# Altium PCB TS12A4514DBVR.PcbDoc
Units mil, origin at the board's own origin, x right, y up, seen from the top; angles counter-clockwise.
Board outline 588 x 300 mil, 2 copper layers (Top, Bottom), stack 61.811 mil thick; 3 components, 5 nets, 10 pads, 0 vias.
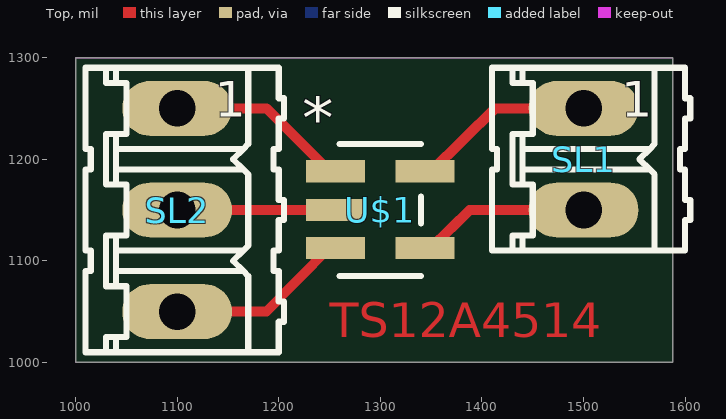
[diagram p0: Top view]
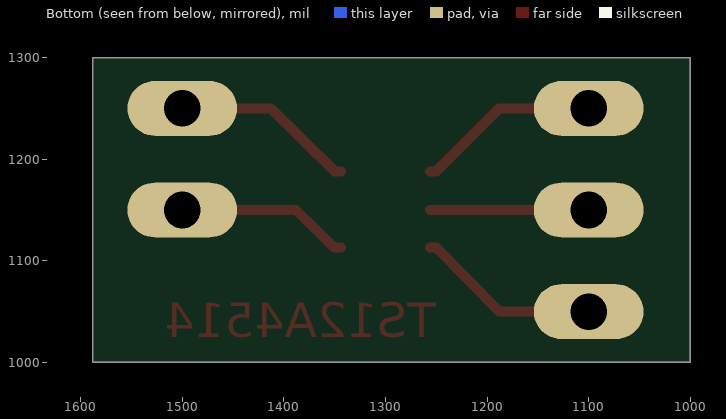
[diagram p1: Bottom view, seen from below]

## Layer stack, top to bottom
Top Solder: solder mask 0.4, Solder Resist, Dk 3.5
Top: signal copper 1.378
Dielectric 1: core 59.0551, FR-4, Dk 4.8
Bottom: signal copper 1.378
Bottom Solder: solder mask 0.4, Solder Resist, Dk 3.5

## Board outline
1000,1000 1588,1000 1588,1300 1000,1300

## Design rules (kind name [scope] priority, off if disabled: settings)
Clearance mdViaVia [IsVia vs IsVia] p1: gap=8
Clearance mdPadVia [IsPad vs IsVia] p2: gap=8
Clearance mdPadPad [IsPad vs IsPad] p3: gap=8
Clearance mdWireVia [(InLayerClass('Signal Layers') AND IsTrack) vs IsVia] p4: gap=8
Clearance mdWirePad [(InLayerClass('Signal Layers') AND IsTrack) vs IsPad] p5: gap=8
Clearance mdWireWire [(InLayerClass('Signal Layers') AND IsTrack) vs (InLayerClass('Signal Layers') AND IsTrack)] p6: gap=8
Clearance [All] p7: gap=8
HoleSize [All] p1: absolutevalues=TRUE maxlimit=100000 minlimit=24 maxpercent=80.000 minpercent=20.000
HoleToHoleClearance [All] p1: gap=8 allowstackedmicrovias=TRUE
PolygonConnect ThermalVias [IsVia] p1: connectstyle=Direct reliefconductorwidth=10 reliefentries=4 polygonreliefangle="90 Angle" airgapwidth=10
PolygonConnect [All] p2: connectstyle=Relief reliefconductorwidth=10 reliefentries=4 polygonreliefangle="90 Angle" airgapwidth=10
RoutingVias [All] p1: holewidth=28 width=50 viastyle="Through Hole" minholewidth=28 minwidth=50 maxholewidth=28 maxwidth=50
SilkToSilkClearance [All] p1 off: silktosilkclearance=10
SilkToSolderMaskClearance [IsPad] p1 off: minsilkscreentomaskgap=10 clearancetoexposedcopper=TRUE
SolderMaskExpansion [All] p1: expansion=4
UnpouredPolygon [All] p1: allowunpoured=FALSE
Width [All] p1: maxlimit=100000 minlimit=10 preferedwidth=10
25 further rules are at their usual default settings.

## Components (designator, comment, footprint, x,y, rotation, side; value= is the part's Value field where it differs from the comment)
SL1 "" 02P 1500,1200 r270 top
SL2 "" 03P 1100,1150 r270 top
U$1 "" DBV5 1300,1150 r0 top

## Footprints (in the part's own frame and the unit in brackets; to place one, negate y for a bottom-side part, rotate by r counter-clockwise, add the part's x,y. Pads: shape width x height; smd on the part's side, far side on the other; paste and mask are expansions set on the pad)
02P [mil] "02P"
  oval 54x108 hole 36: 1(-50,0) 2(50,0)
  silkscreen extent -90,-90 90,105
03P [mil] "03P"
  oval 54x108 hole 36: 1(-100,0) 2(0,0) 3(100,0)
  silkscreen extent -140,-90 140,105
DBV5 [mil] "DBV5"
  rect 58x22 smd: 1(-44,38) 2(-44,0) 3(-44,-37.4) 4(44,-37.4) 5(44,38)
  silkscreen extent -40,-65 40,65

## Part data
SL1: library part 02P
SL2: library part 03P
U$1: library part DBV5

## Nets (pads, with @x,y where several pads share a name; then routed paths per layer and width w, separated by ;. In a path a pad name is that pad's centre, name@x,y a point inside that pad or via, vN(x,y) a via of type N, cw(c..) or ccw(c..) an arc to the next point about the centre after c; other vN are vias at no path point)
N$1: SL1.1 U$1.5 | length 181.4
  Top w10: U$1.5 1350,1188 1413,1250 SL1.1
N$2: SL1.2 U$1.4 | length 171
  Top w10: U$1.4@1344,1113 1350,1113 1388,1150 SL1.2
N$3: SL2.1 U$1.1 | length 181.7
  Top w10: SL2.1 1188,1250 1250,1188 U$1.1
N$4: SL2.2 U$1.2 | length 156
  Top w10: SL2.2 U$1.2
N$5: SL2.3 U$1.3 | length 182.4
  Top w10: SL2.3 1188,1050 1250,1113 U$1.3@1256,1113

## Keep-outs
Keep-Out Layer:
  the board outline again, w0

## Other copper
Top:
  text "TS12A4514" at 1250,1025 h34

## Silkscreen, mask and mechanical layers (free items; w line width, h text height)
Dimension:
  the board outline again, w0

## Text inside footprints (layer, text, board x,y; h text height)
SL1: Top Overlay "1" at 1537,1230 h60.45
SL2: Top Overlay "1" at 1137,1230 h60.45
U$1: tDocu "*" at 1253,1166 h77.5; Top Overlay "*" at 1223,1204 h77.5